# EAGLE board xen_teensy_motherboard_12cv_mki (EAGLE 9.6.0), part 1 of 2
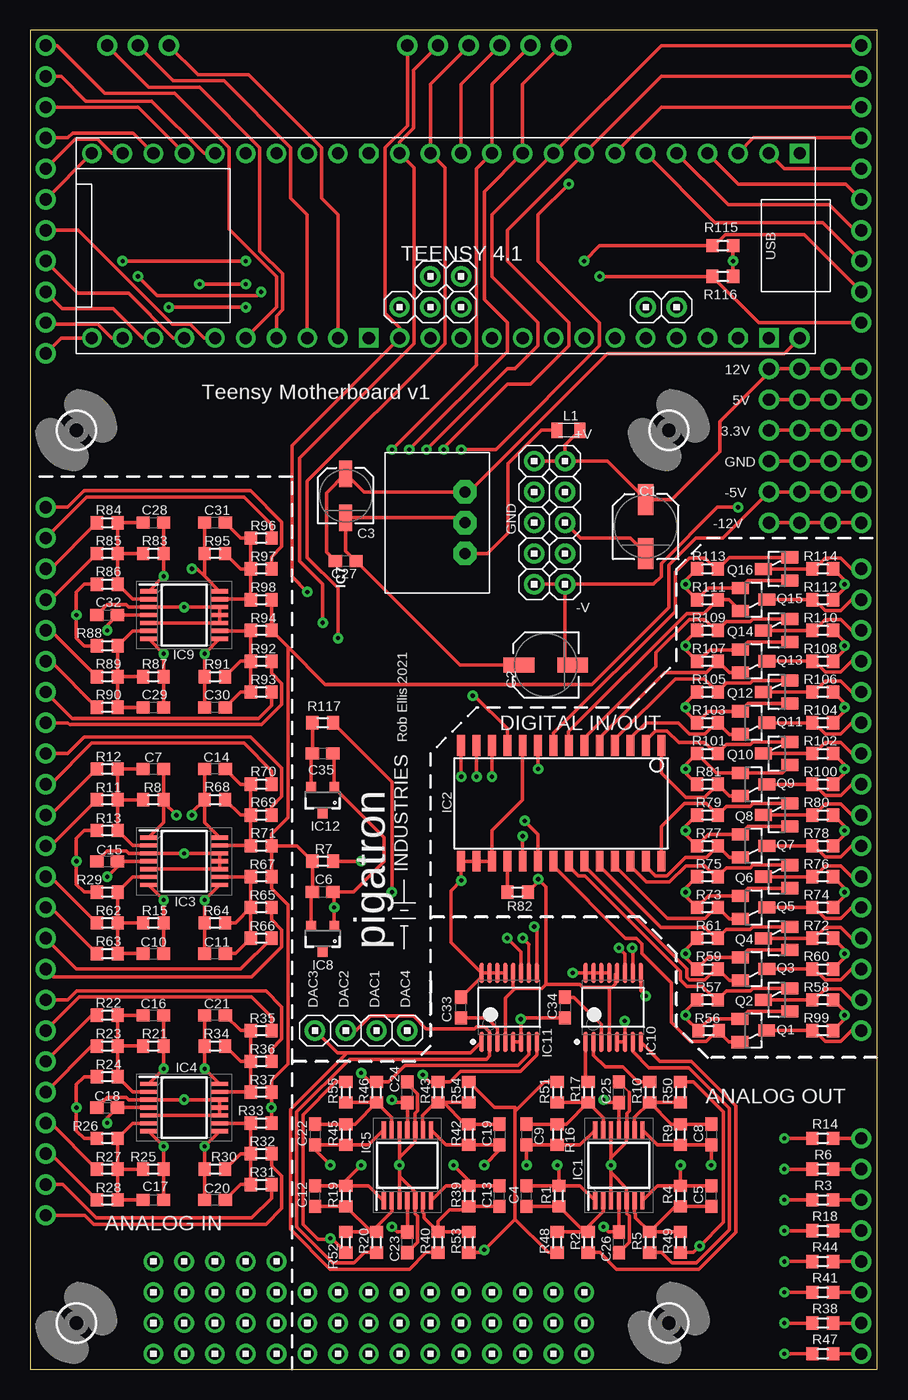
[diagram p0: board, top side]
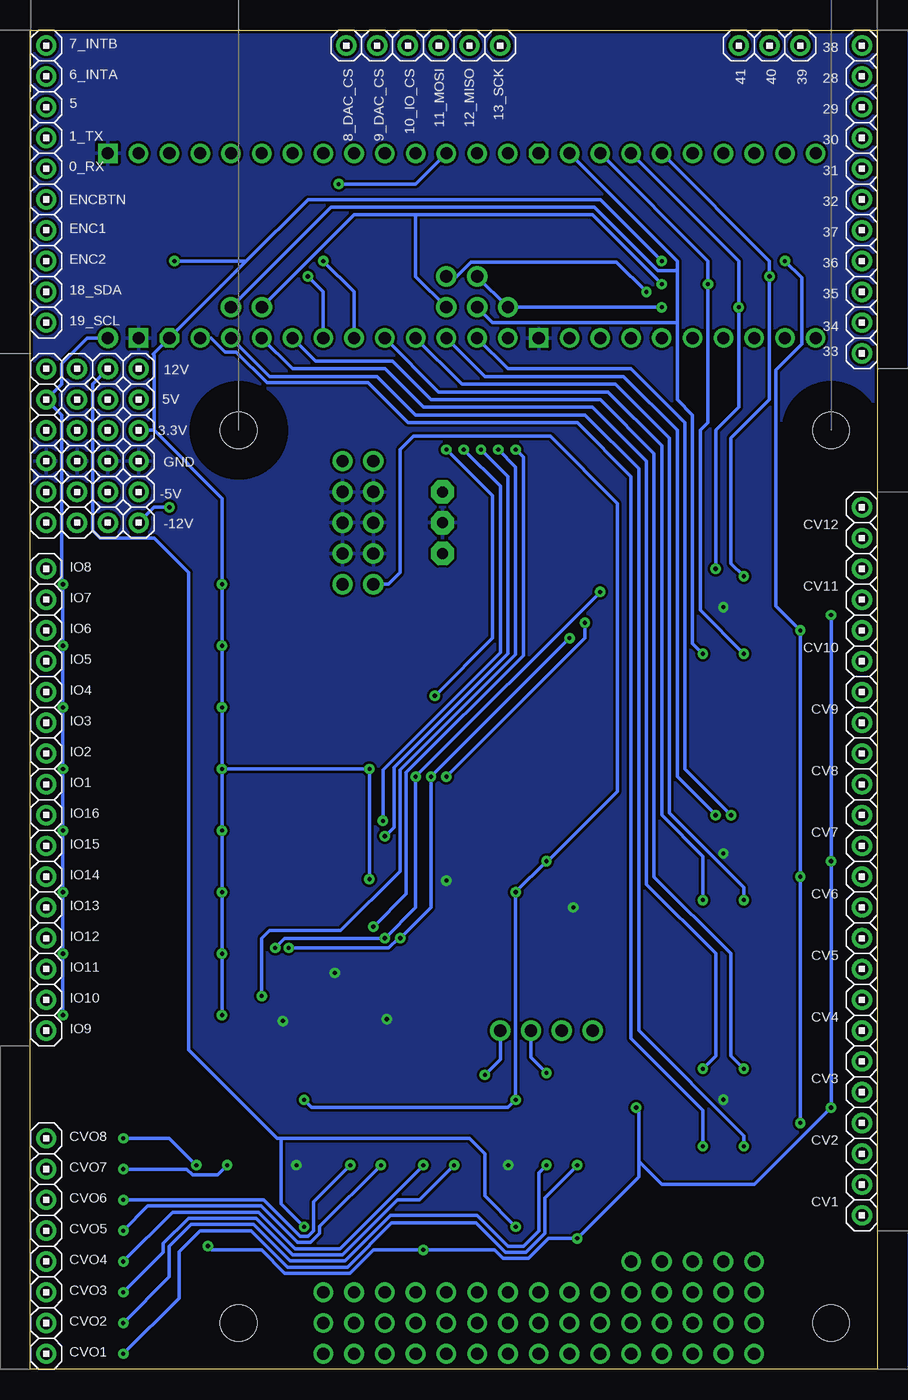
[diagram p1: board, bottom side, seen from below]

Size 69.9 x 110.48 mm. Coordinates in mm from the lower left corner, seen from the top.
Outline: 0,0 69.9,0 69.9,110.48 0,110.48 0,0
Copper layers (1*16): Top 0.0356mm / dielectric 1.5011mm / Bottom 0.0356mm
Design rules "pigatron *": minimum track width 8mil, minimum drill 13mil, track to track 8mil, track to pad 8mil, pad to pad 8mil, via to via 8mil, smd to smd 6mil, copper to edge 10mil, drill to drill 10mil, minimum pad ring 12mil, minimum via ring 10mil, stop-mask expansion 4mil, vias tented up to drill 15mil, thermal gap 10mil

## Footprints (pad centres in the part's own frame; a part is rotated, then mirrored left to right if it is on the bottom)
HEADER/MALE/01 = drill 1.016 pad 1.676: 1 0,0
SV-C = smd 2.54 x 1.27: + -2.223,0; - 2.223,0
SV-B = smd 2.184 x 1.067: + -1.81,0; - 1.81,0
C0603 = smd 1.1 x 1: 1 -0.85,0; 2 0.85,0
TSSOP14 = smd 0.35 x 1.4: 1 -1.95,-2.938; 2 -1.3,-2.938; 3 -0.65,-2.938; 4 0,-2.938; 5 0.65,-2.938; 6 1.3,-2.938; 7 1.95,-2.938; 8 1.95,2.938; 9 1.3,2.938; 10 0.65,2.938; 11 0,2.938; 12 -0.65,2.938; 13 -1.3,2.938; 14 -1.95,2.938
SO28W = smd 0.65 x 1.7: 1 -7.62,-4.78; 2 -6.35,-4.78; 3 -5.08,-4.78; 4 -3.81,-4.78; 5 -2.54,-4.78; 6 -1.27,-4.78; 7 0,-4.78; 8 1.27,-4.78; 9 2.54,-4.78; 10 3.81,-4.78; 11 5.08,-4.78; 12 6.35,-4.78; 13 7.62,-4.78; 14 8.89,-4.78; 15 8.89,4.78; 16 7.62,4.78; 17 6.35,4.78; 18 5.08,4.78; 19 3.81,4.78; 20 2.54,4.78; 21 1.27,4.78; 22 0,4.78; 23 -1.27,4.78; 24 -2.54,4.78; 25 -3.81,4.78; 26 -5.08,4.78; 27 -6.35,4.78; 28 -7.62,4.78
TENNSY41-OUTER = drill 1: 0-RX1/CS1/CRX2 -27.94,-7.62; 1-TX1/MISO1/CTX2 -25.4,-7.62; 2-OUT2 -22.86,-7.62; 3-LRCLK2 -20.32,-7.62; 4-BCLK2 -17.78,-7.62; 5-IN2 -15.24,-7.62; 6-OUT1D -12.7,-7.62; 7-RX2/OUT1A -10.16,-7.62; 8-TX2/IN1 -7.62,-7.62; 9-OUT1C -5.08,-7.62; 10-CS\MQSR -2.54,-7.62; 11-MOSI/CTX1 0,-7.62; 12-MISO/MQSL 2.54,-7.62; 13-SCK/LED 2.54,7.62; 14-A0/TX3/SPDIF_OUT 0,7.62; 15-A1/RX3/SPDIF_IN -2.54,7.62; 16-A2/RX4/SCL1 -5.08,7.62; 17-A3/TX4/SDA1 -7.62,7.62; 18-A4/SDA0 -10.16,7.62; 19-A5/SCL0 -12.7,7.62; 20-A6/TX5/LRCLK1 -15.24,7.62; 21-A7/RX5/BCLK1 -17.78,7.62; 22-A8/CTX1 -20.32,7.62; 23-A9/CRX1/MCLK1 -22.86,7.62; 24-A10/TX6/SCL2 7.62,-7.62; 25-A11/RX6/SDA2 10.16,-7.62; 26-A12/MOSI1 12.7,-7.62; 27-A13/SCK1 15.24,-7.62; 28-RX7 17.78,-7.62; 29-TX7 20.32,-7.62; 30-CRX3 22.86,-7.62; 31-CTX3 25.4,-7.62; 32-OUT1B 27.94,-7.62; 33-MCLK2 27.94,7.62; 34-RX8 25.4,7.62; 35-TX8 22.86,7.62; 36-PWM 20.32,7.62; 37-PWM 17.78,7.62; 38-A14/CS/IN1 15.24,7.62; 39-A15/CS/OUT1A 12.7,7.62; 40-A16/CS1 10.16,7.62; 41-A17/MISO1 7.62,7.62 | drill 1 octagon: 3V3-1 5.08,-7.62; 3V3-3 -25.4,7.62 | drill 1 square: GND1 -30.48,-7.62; GND3 5.08,7.62; GND6 -27.94,7.62 | drill 1 pad 1.676: VIN -30.48,7.62
WE78 = drill 0.9 pad 1.93 octagon: 1 -2.54,0; 2 0,0; 3 2.54,0
SOT-23 = smd 0.8 x 0.9: 1 -0.95,-1; 2 0.95,-1; 3 0,1.1
TEXAS_INSTRUMENTS_DAC8164IBPWG4_1 = smd 1.7 x 0.35: 1 -2.85,2.275; 2 -2.85,1.625; 3 -2.85,0.975; 4 -2.85,0.325; 5 -2.85,-0.325; 6 -2.85,-0.975; 7 -2.85,-1.625; 8 -2.85,-2.275; 9 2.85,-2.275; 10 2.85,-1.625; 11 2.85,-0.975; 12 2.85,-0.325; 13 2.85,0.325; 14 2.85,0.975; 15 2.85,1.625; 16 2.85,2.275
L2012C = smd 0.9 x 1.25: 1 -0.9,0; 2 1,0
HEADER/MALE/01/NOBORDER = drill 1.016: 1 0,0
SOT23 = smd 1 x 1.4: 1 -0.95,-1.1; 2 0.95,-1.1; 3 0,1.1
R0603 = smd 1 x 1.1: 1 -0.85,0; 2 0.85,0
STANDOFF/3.0 = hole 3: 0,0

## Placement (x,y rotation side)
0_RX  HEADER/MALE/01  [HEADER/MALE/01]  68.58,99.06 0 bottom
1_TX  HEADER/MALE/01  [HEADER/MALE/01]  68.58,101.6 0 bottom
3.3V  HEADER/MALE/01  [HEADER/MALE/01]  60.96,77.47 90 bottom
3.3V1  HEADER/MALE/01  [HEADER/MALE/01]  63.5,77.47 180 bottom
3.3V2  HEADER/MALE/01  [HEADER/MALE/01]  66.04,77.47 0 bottom
3.3V3  HEADER/MALE/01  [HEADER/MALE/01]  68.58,77.47 0 bottom
5  HEADER/MALE/01  [HEADER/MALE/01]  68.58,104.14 0 bottom
5V  HEADER/MALE/01  [HEADER/MALE/01]  60.96,80.01 180 bottom
5V1  HEADER/MALE/01  [HEADER/MALE/01]  63.5,80.01 180 bottom
5V2  HEADER/MALE/01  [HEADER/MALE/01]  66.04,80.01 0 bottom
5V3  HEADER/MALE/01  [HEADER/MALE/01]  68.58,80.01 0 bottom
6_INTA  HEADER/MALE/01  [HEADER/MALE/01]  68.58,106.68 0 bottom
7_INTB  HEADER/MALE/01  [HEADER/MALE/01]  68.58,109.22 0 bottom
8_DAC_CS  HEADER/MALE/01  [HEADER/MALE/01]  43.81,109.22 270 bottom
9_DAC_CS  HEADER/MALE/01  [HEADER/MALE/01]  41.27,109.22 270 bottom
10_IO_CS  HEADER/MALE/01  [HEADER/MALE/01]  38.73,109.22 270 bottom
11_MOSI  HEADER/MALE/01  [HEADER/MALE/01]  36.2,109.22 270 bottom
12_MISO  HEADER/MALE/01  [HEADER/MALE/01]  33.66,109.22 270 bottom
13_SCK  HEADER/MALE/01  [HEADER/MALE/01]  31.11,109.22 270 bottom
18_SDA  HEADER/MALE/01  [HEADER/MALE/01]  68.58,88.9 0 bottom
19_SCL  HEADER/MALE/01  [HEADER/MALE/01]  68.58,86.36 0 bottom
24_4.0-A10  HEADER/MALE/01  [HEADER/MALE/01]  33.02,87.63 0 top
24_LC-A10  HEADER/MALE/01  [HEADER/MALE/01]  53.34,87.63 90 top
25_4.0-A11  HEADER/MALE/01  [HEADER/MALE/01]  35.56,87.63 0 top
25_LC-A11  HEADER/MALE/01  [HEADER/MALE/01]  50.8,87.63 90 top
26_4.0-A12  HEADER/MALE/01  [HEADER/MALE/01]  33.02,90.17 0 top
26_LC-A12  HEADER/MALE/01  [HEADER/MALE/01]  30.48,87.63 90 top
27_4.0-A13  HEADER/MALE/01  [HEADER/MALE/01]  35.56,90.17 0 top
28  HEADER/MALE/01  [HEADER/MALE/01]  1.27,106.68 180 bottom
29  HEADER/MALE/01  [HEADER/MALE/01]  1.27,104.14 180 bottom
30  HEADER/MALE/01  [HEADER/MALE/01]  1.27,101.6 180 bottom
31  HEADER/MALE/01  [HEADER/MALE/01]  1.27,99.06 180 bottom
32  HEADER/MALE/01  [HEADER/MALE/01]  1.27,96.52 180 bottom
33  HEADER/MALE/01  [HEADER/MALE/01]  1.27,83.82 180 bottom
34  HEADER/MALE/01  [HEADER/MALE/01]  1.27,86.36 180 bottom
35  HEADER/MALE/01  [HEADER/MALE/01]  1.27,88.9 180 bottom
36  HEADER/MALE/01  [HEADER/MALE/01]  1.27,91.44 180 bottom
37  HEADER/MALE/01  [HEADER/MALE/01]  1.27,93.98 180 bottom
38  HEADER/MALE/01  [HEADER/MALE/01]  1.27,109.22 180 bottom
39  HEADER/MALE/01  [HEADER/MALE/01]  6.35,109.22 270 bottom
40  HEADER/MALE/01  [HEADER/MALE/01]  8.89,109.22 270 bottom
41  HEADER/MALE/01  [HEADER/MALE/01]  11.43,109.22 270 bottom
+V  HEADER/MALE/01  [HEADER/MALE/01]  44.13,74.93 0 top
+V1  HEADER/MALE/01  [HEADER/MALE/01]  63.5,82.55 0 bottom
+V2  HEADER/MALE/01  [HEADER/MALE/01]  41.59,74.93 180 top
+V3  HEADER/MALE/01  [HEADER/MALE/01]  60.96,82.55 0 bottom
+V4  HEADER/MALE/01  [HEADER/MALE/01]  66.04,82.55 0 bottom
+V5  HEADER/MALE/01  [HEADER/MALE/01]  68.58,82.55 0 bottom
-5V  HEADER/MALE/01  [HEADER/MALE/01]  63.5,72.39 180 bottom
-5V1  HEADER/MALE/01  [HEADER/MALE/01]  60.96,72.39 180 bottom
-5V2  HEADER/MALE/01  [HEADER/MALE/01]  66.04,72.39 0 bottom
-5V3  HEADER/MALE/01  [HEADER/MALE/01]  68.58,72.39 0 bottom
-V  HEADER/MALE/01  [HEADER/MALE/01]  44.13,64.77 0 top
-V1  HEADER/MALE/01  [HEADER/MALE/01]  60.96,69.85 0 bottom
-V2  HEADER/MALE/01  [HEADER/MALE/01]  41.59,64.77 180 top
-V3  HEADER/MALE/01  [HEADER/MALE/01]  63.5,69.85 0 bottom
-V4  HEADER/MALE/01  [HEADER/MALE/01]  66.04,69.85 0 bottom
-V5  HEADER/MALE/01  [HEADER/MALE/01]  68.58,69.85 0 bottom
C1  22uF  [SV-C]  50.8,69.53 270 top
C2  22uF  [SV-C]  42.55,58.1 0 top
C3  10uF  [SV-B]  26.04,72.07 270 top
C4  100pF  [C0603]  40.96,14.29 90 top
C5  100pF  [C0603]  56.2,14.29 90 top
C6  100nF  [C0603]  24.13,39.37 180 top
C7  1nF  [C0603]  10.16,49.53 0 top
C8  100pF  [C0603]  56.2,19.37 270 top
C9  100pF  [C0603]  40.96,19.37 270 top
C10  1nF  [C0603]  10.16,34.29 0 top
C11  1nF  [C0603]  15.24,34.29 180 top
C12  100pF  [C0603]  23.5,14.29 90 top
C13  100pF  [C0603]  38.73,14.29 90 top
C14  1nF  [C0603]  15.24,49.53 180 top
C15  100nF  [C0603]  6.35,41.91 0 top
C16  1nF  [C0603]  10.16,29.21 0 top
C17  1nF  [C0603]  10.16,13.97 0 top
C18  100nF  [C0603]  6.35,21.59 0 top
C19  100pF  [C0603]  38.73,19.37 270 top
C20  1nF  [C0603]  15.24,13.97 180 top
C21  1nF  [C0603]  15.24,29.21 180 top
C22  100pF  [C0603]  23.5,19.37 270 top
C23  100nF  [C0603]  31.11,10.48 90 top
C24  100nF  [C0603]  31.11,22.86 90 top
C25  100nF  [C0603]  48.58,22.86 90 top
C26  100nF  [C0603]  48.58,10.48 90 top
C27  100nF  [C0603]  26.04,66.67 180 top
C28  1nF  [C0603]  10.16,69.85 0 top
C29  1nF  [C0603]  10.16,54.61 0 top
C30  1nF  [C0603]  15.24,54.61 180 top
C31  1nF  [C0603]  15.24,69.85 180 top
C32  100nF  [C0603]  6.35,62.23 0 top
C33  470nF  [C0603]  35.56,29.84 90 top
C34  470nF  [C0603]  44.13,29.84 270 top
C35  470nF  [C0603]  24.13,50.8 180 top
CV1  HEADER/MALE/01  [HEADER/MALE/01]  1.27,15.24 0 bottom
CV1B  HEADER/MALE/01  [HEADER/MALE/01]  1.27,22.86 0 bottom
CV2  HEADER/MALE/01  [HEADER/MALE/01]  1.27,20.32 0 bottom
CV2B  HEADER/MALE/01  [HEADER/MALE/01]  1.27,17.78 0 bottom
CV3  HEADER/MALE/01  [HEADER/MALE/01]  1.27,25.4 0 bottom
CV3B  HEADER/MALE/01  [HEADER/MALE/01]  1.27,12.7 0 bottom
CV4  HEADER/MALE/01  [HEADER/MALE/01]  1.27,27.94 0 bottom
CV4B  HEADER/MALE/01  [HEADER/MALE/01]  1.27,30.48 0 bottom
CV5  HEADER/MALE/01  [HEADER/MALE/01]  1.27,33.02 180 bottom
CV6  HEADER/MALE/01  [HEADER/MALE/01]  1.27,40.64 180 bottom
CV7  HEADER/MALE/01  [HEADER/MALE/01]  1.27,43.18 180 bottom
CV8  HEADER/MALE/01  [HEADER/MALE/01]  1.27,50.8 180 bottom
CV9  HEADER/MALE/01  [HEADER/MALE/01]  1.27,53.34 180 bottom
CV9B  HEADER/MALE/01  [HEADER/MALE/01]  1.27,45.72 180 bottom
CV10  HEADER/MALE/01  [HEADER/MALE/01]  1.27,60.96 180 bottom
CV10B  HEADER/MALE/01  [HEADER/MALE/01]  1.27,38.1 180 bottom
CV11  HEADER/MALE/01  [HEADER/MALE/01]  1.27,66.04 180 bottom
CV11B  HEADER/MALE/01  [HEADER/MALE/01]  1.27,35.56 180 bottom
CV12  HEADER/MALE/01  [HEADER/MALE/01]  1.27,68.58 180 bottom
CV12B  HEADER/MALE/01  [HEADER/MALE/01]  1.27,48.26 180 bottom
CV13B  HEADER/MALE/01  [HEADER/MALE/01]  1.27,63.5 180 bottom
CV14B  HEADER/MALE/01  [HEADER/MALE/01]  1.27,58.42 180 bottom
CV15B  HEADER/MALE/01  [HEADER/MALE/01]  1.27,55.88 180 bottom
CV16B  HEADER/MALE/01  [HEADER/MALE/01]  1.27,71.12 180 bottom
CVO1  HEADER/MALE/01  [HEADER/MALE/01]  68.58,1.27 0 bottom
CVO2  HEADER/MALE/01  [HEADER/MALE/01]  68.58,3.81 0 bottom
CVO3  HEADER/MALE/01  [HEADER/MALE/01]  68.58,6.35 0 bottom
CVO4  HEADER/MALE/01  [HEADER/MALE/01]  68.58,8.89 0 bottom
CVO5  HEADER/MALE/01  [HEADER/MALE/01]  68.58,11.43 0 bottom
CVO6  HEADER/MALE/01  [HEADER/MALE/01]  68.58,13.97 0 bottom
CVO7  HEADER/MALE/01  [HEADER/MALE/01]  68.58,16.51 0 bottom
CVO8  HEADER/MALE/01  [HEADER/MALE/01]  68.58,19.05 0 bottom
DAC1  HEADER/MALE/01  [HEADER/MALE/01]  28.57,27.94 90 top
DAC2  HEADER/MALE/01  [HEADER/MALE/01]  26.04,27.94 90 top
DAC3  HEADER/MALE/01  [HEADER/MALE/01]  23.5,27.94 90 top
DAC4  HEADER/MALE/01  [HEADER/MALE/01]  31.11,27.94 90 top
ENC1  HEADER/MALE/01  [HEADER/MALE/01]  68.58,93.98 0 bottom
ENC2  HEADER/MALE/01  [HEADER/MALE/01]  68.58,91.44 0 bottom
ENCBTN  HEADER/MALE/01  [HEADER/MALE/01]  68.58,96.52 0 bottom
GND  HEADER/MALE/01  [HEADER/MALE/01]  44.13,69.85 0 top
GND1  HEADER/MALE/01  [HEADER/MALE/01]  44.13,72.39 0 top
GND2  HEADER/MALE/01  [HEADER/MALE/01]  41.59,67.31 180 top
GND3  HEADER/MALE/01  [HEADER/MALE/01]  44.13,67.31 180 top
GND4  HEADER/MALE/01  [HEADER/MALE/01]  41.59,69.85 0 top
GND5  HEADER/MALE/01  [HEADER/MALE/01]  41.59,72.39 0 top
GND6  HEADER/MALE/01  [HEADER/MALE/01]  63.5,74.93 0 bottom
GND7  HEADER/MALE/01  [HEADER/MALE/01]  60.96,74.93 0 bottom
GND8  HEADER/MALE/01  [HEADER/MALE/01]  66.04,74.93 0 bottom
GND9  HEADER/MALE/01  [HEADER/MALE/01]  68.58,74.93 0 bottom
IC1  TL074PW  [TSSOP14]  48.58,16.83 0 top
IC2  MCP23S17SO  [SO28W]  44.45,46.69 180 top
IC3  MCP6004  [TSSOP14]  12.7,41.91 270 top
IC4  MCP6004  [TSSOP14]  12.7,21.59 270 top
IC5  TL074PW  [TSSOP14]  31.11,16.83 0 top
IC6  TEENSY41-OUTER  [TENNSY41-OUTER]  33.02,92.71 180 top
IC7  R-78E5.0-0.5  [WE78]  35.88,69.85 90 top
IC8  LM4040-5V  [SOT-23]  24.13,35.56 180 top
IC9  MCP6004  [TSSOP14]  12.7,62.23 270 top
IC10  TEXAS_INSTRUMENTS_DAC8164IBPWG4TEXAS_INSTRUMENTS_DAC8164IBPWG4_0_1  [TEXAS_INSTRUMENTS_DAC8164IBPWG4_1]  48.1,29.84 90 top
IC11  TEXAS_INSTRUMENTS_DAC8164IBPWG4TEXAS_INSTRUMENTS_DAC8164IBPWG4_0_1  [TEXAS_INSTRUMENTS_DAC8164IBPWG4_1]  39.53,29.84 90 top
IC12  LM4040-10V  [SOT-23]  24.13,46.99 180 top
IO1  HEADER/MALE/01  [HEADER/MALE/01]  68.58,48.26 180 bottom
IO2  HEADER/MALE/01  [HEADER/MALE/01]  68.58,50.8 180 bottom
IO3  HEADER/MALE/01  [HEADER/MALE/01]  68.58,53.34 180 bottom
IO4  HEADER/MALE/01  [HEADER/MALE/01]  68.58,55.88 180 bottom
IO5  HEADER/MALE/01  [HEADER/MALE/01]  68.58,58.42 180 bottom
IO6  HEADER/MALE/01  [HEADER/MALE/01]  68.58,60.96 180 bottom
IO7  HEADER/MALE/01  [HEADER/MALE/01]  68.58,63.5 180 bottom
IO8  HEADER/MALE/01  [HEADER/MALE/01]  68.58,66.04 180 bottom
IO9  HEADER/MALE/01  [HEADER/MALE/01]  68.58,27.94 180 bottom
IO10  HEADER/MALE/01  [HEADER/MALE/01]  68.58,30.48 180 bottom
IO11  HEADER/MALE/01  [HEADER/MALE/01]  68.58,33.02 180 bottom
IO12  HEADER/MALE/01  [HEADER/MALE/01]  68.58,35.56 180 bottom
IO13  HEADER/MALE/01  [HEADER/MALE/01]  68.58,38.1 180 bottom
IO14  HEADER/MALE/01  [HEADER/MALE/01]  68.58,40.64 180 bottom
IO15  HEADER/MALE/01  [HEADER/MALE/01]  68.58,43.18 180 bottom
IO16  HEADER/MALE/01  [HEADER/MALE/01]  68.58,45.72 180 bottom
L1  33uH  [L2012C]  44.45,77.47 180 top
P1  HEADER/MALE/01NOBORDER  [HEADER/MALE/01/NOBORDER]  10.16,1.27 0 top
P2  HEADER/MALE/01NOBORDER  [HEADER/MALE/01/NOBORDER]  12.7,1.27 0 top
P3  HEADER/MALE/01NOBORDER  [HEADER/MALE/01/NOBORDER]  15.24,1.27 0 top
P4  HEADER/MALE/01NOBORDER  [HEADER/MALE/01/NOBORDER]  17.78,1.27 0 top
P5  HEADER/MALE/01NOBORDER  [HEADER/MALE/01/NOBORDER]  20.32,1.27 0 top
P6  HEADER/MALE/01NOBORDER  [HEADER/MALE/01/NOBORDER]  10.16,3.81 0 top
P7  HEADER/MALE/01NOBORDER  [HEADER/MALE/01/NOBORDER]  12.7,3.81 0 top
P8  HEADER/MALE/01NOBORDER  [HEADER/MALE/01/NOBORDER]  15.24,3.81 0 top
P9  HEADER/MALE/01NOBORDER  [HEADER/MALE/01/NOBORDER]  17.78,3.81 0 top
P10  HEADER/MALE/01NOBORDER  [HEADER/MALE/01/NOBORDER]  20.32,3.81 0 top
P11  HEADER/MALE/01NOBORDER  [HEADER/MALE/01/NOBORDER]  10.16,6.35 0 top
P12  HEADER/MALE/01NOBORDER  [HEADER/MALE/01/NOBORDER]  12.7,6.35 0 top
P13  HEADER/MALE/01NOBORDER  [HEADER/MALE/01/NOBORDER]  15.24,6.35 0 top
P14  HEADER/MALE/01NOBORDER  [HEADER/MALE/01/NOBORDER]  17.78,6.35 0 top
P15  HEADER/MALE/01NOBORDER  [HEADER/MALE/01/NOBORDER]  20.32,6.35 0 top
P16  HEADER/MALE/01NOBORDER  [HEADER/MALE/01/NOBORDER]  10.16,8.89 0 top
P17  HEADER/MALE/01NOBORDER  [HEADER/MALE/01/NOBORDER]  12.7,8.89 0 top
P18  HEADER/MALE/01NOBORDER  [HEADER/MALE/01/NOBORDER]  15.24,8.89 0 top
P19  HEADER/MALE/01NOBORDER  [HEADER/MALE/01/NOBORDER]  17.78,8.89 0 top
P20  HEADER/MALE/01NOBORDER  [HEADER/MALE/01/NOBORDER]  20.32,8.89 0 top
P21  HEADER/MALE/01NOBORDER  [HEADER/MALE/01/NOBORDER]  22.86,1.27 0 top
P22  HEADER/MALE/01NOBORDER  [HEADER/MALE/01/NOBORDER]  22.86,3.81 0 top
P23  HEADER/MALE/01NOBORDER  [HEADER/MALE/01/NOBORDER]  25.4,1.27 0 top
P24  HEADER/MALE/01NOBORDER  [HEADER/MALE/01/NOBORDER]  22.86,6.35 0 top
P25  HEADER/MALE/01NOBORDER  [HEADER/MALE/01/NOBORDER]  25.4,3.81 0 top
P26  HEADER/MALE/01NOBORDER  [HEADER/MALE/01/NOBORDER]  25.4,6.35 0 top
P27  HEADER/MALE/01NOBORDER  [HEADER/MALE/01/NOBORDER]  30.48,6.35 0 top
P28  HEADER/MALE/01NOBORDER  [HEADER/MALE/01/NOBORDER]  27.94,6.35 0 top
P29  HEADER/MALE/01NOBORDER  [HEADER/MALE/01/NOBORDER]  30.48,3.81 0 top
P30  HEADER/MALE/01NOBORDER  [HEADER/MALE/01/NOBORDER]  27.94,3.81 0 top
P31  HEADER/MALE/01NOBORDER  [HEADER/MALE/01/NOBORDER]  30.48,1.27 0 top
P32  HEADER/MALE/01NOBORDER  [HEADER/MALE/01/NOBORDER]  27.94,1.27 0 top
P33  HEADER/MALE/01NOBORDER  [HEADER/MALE/01/NOBORDER]  33.02,6.35 0 top
P34  HEADER/MALE/01NOBORDER  [HEADER/MALE/01/NOBORDER]  33.02,3.81 0 top
P35  HEADER/MALE/01NOBORDER  [HEADER/MALE/01/NOBORDER]  35.56,6.35 0 top
P36  HEADER/MALE/01NOBORDER  [HEADER/MALE/01/NOBORDER]  33.02,1.27 0 top
P37  HEADER/MALE/01NOBORDER  [HEADER/MALE/01/NOBORDER]  38.1,3.81 0 top
P38  HEADER/MALE/01NOBORDER  [HEADER/MALE/01/NOBORDER]  35.56,3.81 0 top
P39  HEADER/MALE/01NOBORDER  [HEADER/MALE/01/NOBORDER]  40.64,6.35 0 top
P40  HEADER/MALE/01NOBORDER  [HEADER/MALE/01/NOBORDER]  35.56,1.27 0 top
P41  HEADER/MALE/01NOBORDER  [HEADER/MALE/01/NOBORDER]  40.64,3.81 0 top
P42  HEADER/MALE/01NOBORDER  [HEADER/MALE/01/NOBORDER]  38.1,6.35 0 top
P43  HEADER/MALE/01NOBORDER  [HEADER/MALE/01/NOBORDER]  43.18,6.35 0 top
P44  HEADER/MALE/01NOBORDER  [HEADER/MALE/01/NOBORDER]  38.1,1.27 0 top
P45  HEADER/MALE/01NOBORDER  [HEADER/MALE/01/NOBORDER]  43.18,3.81 0 top
P46  HEADER/MALE/01NOBORDER  [HEADER/MALE/01/NOBORDER]  40.64,1.27 0 top
P47  HEADER/MALE/01NOBORDER  [HEADER/MALE/01/NOBORDER]  43.18,1.27 0 top
P48  HEADER/MALE/01NOBORDER  [HEADER/MALE/01/NOBORDER]  45.72,6.35 0 top
P49  HEADER/MALE/01NOBORDER  [HEADER/MALE/01/NOBORDER]  45.72,3.81 0 top
P50  HEADER/MALE/01NOBORDER  [HEADER/MALE/01/NOBORDER]  45.72,1.27 0 top
Q1  BF170  [SOT23]  59.67,27.94 270 top
Q2  BF170  [SOT23]  61.59,30.48 90 top
Q3  BF170  [SOT23]  59.69,33.02 270 top
Q4  BF170  [SOT23]  61.59,35.56 90 top
Q5  BF170  [SOT23]  59.69,38.1 270 top
Q6  BF170  [SOT23]  61.59,40.64 90 top
Q7  BF170  [SOT23]  59.69,43.18 270 top
Q8  BF170  [SOT23]  61.59,45.72 90 top
Q9  BF170  [SOT23]  59.69,48.26 270 top
Q10  BF170  [SOT23]  61.59,50.8 90 top
Q11  BF170  [SOT23]  59.69,53.34 270 top
Q12  BF170  [SOT23]  61.59,55.88 90 top
Q13  BF170  [SOT23]  59.69,58.42 270 top
Q14  BF170  [SOT23]  61.59,60.96 90 top
Q15  BF170  [SOT23]  59.69,63.5 270 top
Q16  BF170  [SOT23]  61.59,66.04 90 top
R1  120k  [R0603]  43.62,14.29 90 top
R2  30k  [R0603]  46.04,10.48 90 top
R3  1k  [R0603]  65.41,13.97 0 top
R4  120k  [R0603]  53.66,14.29 90 top
R5  30k  [R0603]  51.12,10.48 90 top
R6  1k  [R0603]  65.41,16.51 0 top
R7  2K  [R0603]  24.13,41.91 0 top
R8  33k  [R0603]  10.16,46.99 0 top
R9  120k  [R0603]  53.66,19.37 270 top
R10  30k  [R0603]  51.12,22.86 270 top
R11  100k  [R0603]  6.35,46.99 0 top
R12  100k  [R0603]  6.35,49.53 0 top
R13  100k  [R0603]  6.35,44.45 0 top
R14  1k  [R0603]  65.41,19.05 0 top
R15  33k  [R0603]  10.16,36.83 0 top
R16  120k  [R0603]  43.5,19.37 270 top
R17  30k  [R0603]  46.04,22.86 270 top
R18  1k  [R0603]  65.41,11.43 0 top
R19  120k  [R0603]  26.04,14.29 90 top
R20  30k  [R0603]  28.57,10.48 90 top
R21  33k  [R0603]  10.16,26.67 0 top
R22  100k  [R0603]  6.35,29.21 0 top
R23  100k  [R0603]  6.35,26.67 0 top
R24  100k  [R0603]  6.35,24.13 0 top
R25  33k  [R0603]  10.16,16.51 0 top
R26  100k  [R0603]  6.35,19.05 0 top
R27  100k  [R0603]  6.35,16.51 0 top
R28  100k  [R0603]  6.35,13.97 0 top
R29  100k  [R0603]  6.35,39.37 0 top
R30  33k  [R0603]  15.24,16.51 180 top
R31  100k  [R0603]  19.05,15.24 180 top
R32  100k  [R0603]  19.05,17.78 180 top
R33  100k  [R0603]  19.05,20.32 180 top
R34  33k  [R0603]  15.24,26.67 180 top
R35  100k  [R0603]  19.05,27.94 180 top
R36  100k  [R0603]  19.05,25.4 180 top
R37  100k  [R0603]  19.05,22.86 180 top
R38  1k  [R0603]  65.41,3.81 0 top
R39  120k  [R0603]  36.2,14.29 90 top
R40  30k  [R0603]  33.66,10.48 90 top
R41  1k  [R0603]  65.41,6.35 0 top
R42  120k  [R0603]  36.2,19.37 270 top
R43  30k  [R0603]  33.66,22.86 270 top
R44  1k  [R0603]  65.41,8.89 0 top
R45  120k  [R0603]  26.04,19.37 270 top
R46  30k  [R0603]  28.57,22.86 270 top
R47  1k  [R0603]  65.41,1.27 0 top
R48  120k  [R0603]  43.5,10.48 90 top
R49  120k  [R0603]  53.66,10.48 90 top
R50  120k  [R0603]  53.66,22.86 270 top
R51  120k  [R0603]  43.5,22.86 270 top
R52  120k  [R0603]  26.04,10.48 90 top
R53  120k  [R0603]  36.2,10.48 90 top
R54  120k  [R0603]  36.2,22.86 270 top
R55  120k  [R0603]  26.04,22.86 270 top
R56  10k  [R0603]  55.98,27.94 180 top
R57  10k  [R0603]  55.88,30.48 180 top
R58  10k  [R0603]  65.41,30.48 0 top
R59  10k  [R0603]  55.88,33.02 180 top
R60  10k  [R0603]  65.41,33.02 0 top
R61  10k  [R0603]  55.88,35.56 180 top
R62  100k  [R0603]  6.35,36.83 0 top
R63  100k  [R0603]  6.35,34.29 0 top
R64  33k  [R0603]  15.24,36.83 180 top
R65  100k  [R0603]  19.05,38.1 180 top
R66  100k  [R0603]  19.05,35.56 180 top
R67  100k  [R0603]  19.05,40.64 180 top
R68  33k  [R0603]  15.24,46.99 180 top
R69  100k  [R0603]  19.05,45.72 180 top
R70  100k  [R0603]  19.05,48.26 180 top
R71  100k  [R0603]  19.05,43.18 180 top
R72  10k  [R0603]  65.41,35.56 0 top
R73  10k  [R0603]  55.88,38.1 180 top
R74  10k  [R0603]  65.41,38.1 0 top
R75  10k  [R0603]  55.88,40.64 180 top
R76  10k  [R0603]  65.41,40.64 0 top
R77  10k  [R0603]  55.88,43.18 180 top
R78  10k  [R0603]  65.41,43.18 0 top
R79  10k  [R0603]  55.88,45.72 180 top
R80  10k  [R0603]  65.41,45.72 0 top
R81  10k  [R0603]  55.88,48.26 180 top
R82  1k  [R0603]  40.22,39.37 180 top
R83  33k  [R0603]  10.16,67.31 0 top
R84  100k  [R0603]  6.35,69.85 0 top
R85  100k  [R0603]  6.35,67.31 0 top
R86  100k  [R0603]  6.35,64.77 0 top
R87  33k  [R0603]  10.16,57.15 0 top
R88  100k  [R0603]  6.35,59.69 0 top
R89  100k  [R0603]  6.35,57.15 0 top
R90  100k  [R0603]  6.35,54.61 0 top
R91  33k  [R0603]  15.24,57.15 180 top
R92  100k  [R0603]  19.05,58.42 180 top
R93  100k  [R0603]  19.05,55.88 180 top
R94  100k  [R0603]  19.05,60.96 180 top
R95  33k  [R0603]  15.24,67.31 180 top
R96  100k  [R0603]  19.05,68.58 180 top
R97  100k  [R0603]  19.05,66.04 180 top
R98  100k  [R0603]  19.05,63.5 180 top
R99  10k  [R0603]  65.41,27.94 0 top
R100  10k  [R0603]  65.41,48.26 0 top
R101  10k  [R0603]  55.88,50.8 180 top
R102  10k  [R0603]  65.41,50.8 0 top
R103  10k  [R0603]  55.88,53.34 180 top
R104  10k  [R0603]  65.41,53.34 0 top
R105  10k  [R0603]  55.88,55.88 180 top
R106  10k  [R0603]  65.41,55.88 0 top
R107  10k  [R0603]  55.88,58.42 180 top
R108  10k  [R0603]  65.41,58.42 0 top
R109  10k  [R0603]  55.88,60.96 180 top
R110  10k  [R0603]  65.41,60.96 0 top
R111  10k  [R0603]  55.88,63.5 180 top
R112  10k  [R0603]  65.41,63.5 0 top
R113  10k  [R0603]  55.88,66.04 180 top
R114  10k  [R0603]  65.41,66.04 0 top
R115  2K  [R0603]  57.15,92.71 0 top
R116  2K  [R0603]  57.15,90.17 0 top
R117  1K  [R0603]  24.13,53.34 0 top
U$1  [PIGATRON-LOGO]  29.27,43.56 90 top
U$2  [STANDOFF/3.0]  52.7,3.81 180 top
U$3  [STANDOFF/3.0]  3.81,3.81 180 top
U$4  [STANDOFF/3.0]  52.7,77.47 180 top
U$5  [STANDOFF/3.0]  3.81,77.47 180 top

## Library data of the parts
0_RX 1_TX 3.3V 3.3V1-3.3V3 5 5V 5V1-5V3 6_INTA 7_INTB 8_DAC_CS 9_DAC_CS 10_IO_CS 11_MOSI 12_MISO 13_SCK 18_SDA 19_SCL 24_4.0-A10 24_LC-A10 25_4.0-A11 25_LC-A11 26_4.0-A12 26_LC-A12 27_4.0-A13 28-41 +V +V1-+V5 -5V -5V1--5V3 -V -V1--V5 CV1 CV1B CV2 CV2B CV3 CV3B CV4 CV4B CV5-CV9 CV9B CV10 CV10B CV11 CV11B CV12 CV12B CV13B CV14B CV15B CV16B CVO1-CVO8 DAC1-DAC4 ENC1 ENC2 ENCBTN GND GND1-GND9 IO1-IO16 P1-P50 = connectors; SPICEPREFIX: X
C1-C3 = capacitors; SPICEPREFIX: C
C4-C35 = capacitors
IC1 IC3-IC5 IC9 = ic_analogue
IC2 = ic_digital; MF: MICROCHIP; MPN: MCP23S17-E/SO; OC_FARNELL: unknown; OC_NEWARK: 31K2950
IC6 = microcontroller
IC7 IC8 IC12 = ic_voltage_reg
IC10 IC11 = ic_dac; CIIVA_IDS: 1106843; CODE__JEDEC: MO-153; COMPONENT_LINK_1_DESCRIPTION: Manufacturer URL; COMPONENT_LINK_1_URL: http://www.ti.com/; COMPONENT_LINK_3_DESCRIPTION: Package Specification; COMPONENT_LINK_3_URL: http://www.ti.com/lit/ml/mpds361/mpds361.pdf; DAC_CHANNELS: 4; DATASHEET: http://www.ti.com/general/docs/lit/getliterature.tsp?genericPartNumber=DAC8164&fileType=pdf; DATASHEET_VERSION: SBAS410B; DNL_MAX__LSB: 1; FOOTPRINT_VARIANT_NAME_0: Level C; FOOTPRINT_VARIANT_NAME_1: Level B; FOOTPRINT_VARIANT_NAME_2: Level A; IMPORTED: yes; IMPORTED_FROM: vault; IMPORT_TS: 1521847417; INL_MAX__LSB: 2; INTERFACE: Serial SPI; MF: Texas Instruments; MOUNTING_TECHNOLOGY: Surface Mount; MPN: DAC8164IBPWG4; PACKAGE: PW16; PACKAGE_DESCRIPTION: 16-Pin Plastic Small Outline, Body 5 x 4.4 mm, Pitch 0.65 mm; PACKAGE_VERSION: 4040064-4/G, 02/2011; PIN_0_0_9_INSIDE_EDGE: clock; POWER_CONSUMPTIONTYPMW: 2.6; PREFIX: U; RELEASE_DATE: 1386925912; RESOLUTION_BITS: 14; ROHS: Yes; SETTLING_TIMEUS: 8; SFDRD_B: 79; SNRD_B: 87; SUB_FAMILY: Precision DAC (=<10MSPS); VAULT_GUID: 4CBE38FC-6508-4746-89A4-DCA776D537C7; VAULT_REVISION: 57F45E06-978A-418D-B5AB-51E808FEEA60
L1 R1-R117 = resistors
Q1-Q16 = transistors
U$1-U$5 = mechanical

## Nets
3.3V: 3.3V1.1 3.3V2.1 3.3V3.1 3.3V.1 C15.2 C18.2 C32.2 IC2.9 IC3.4 IC4.4 IC6.3V3-3 IC9.4 IC10.4 IC10.12 IC11.4 IC11.12 Q1.1 Q2.1 Q3.1 Q4.1 Q5.1 Q6.1 Q7.1 Q8.1 Q9.1 Q10.1 Q11.1 Q12.1 Q13.1 Q14.1 Q15.1 Q16.1 R56.2 R57.2 R59.2 R61.2 R73.2 R75.2 R77.2 R79.2 R81.2 R82.1 R101.2 R103.2 R105.2 R107.2 R109.2 R111.2 R113.2 R115.2 R116.2
5V: 5V1.1 5V2.1 5V3.1 5V.1 C3.+ C27.2 IC6.VIN IC7.3 R58.2 R60.2 R72.2 R74.2 R76.2 R78.2 R80.2 R99.2 R100.2 R102.2 R104.2 R106.2 R108.2 R110.2 R112.2 R114.2
+12V: +V1.1 +V2.1 +V3.1 +V4.1 +V5.1 +V.1 C1.+ C23.2 C26.2 IC1.4 IC5.4 L1.1
-5VREF: -5V1.1 -5V2.1 -5V3.1 -5V.1 C6.2 IC8.2 R7.1 R13.1 R24.1 R26.1 R29.1 R33.1 R37.1 R48.1 R49.1 R50.1 R51.1 R52.1 R53.1 R54.1 R55.1 R67.1 R71.1 R86.1 R88.1 R94.1 R98.1
-10VREF: C35.2 IC12.2 R117.1
-12V: -V1.1 -V2.1 -V3.1 -V4.1 -V5.1 -V.1 C2.- C24.1 C25.1 IC1.11 IC5.11 R7.2 R117.2
ADC0: C7.2 IC3.1 IC6.14-A0/TX3/SPDIF_OUT R8.2
ADC1: C14.2 IC3.14 IC6.15-A1/RX3/SPDIF_IN R68.2
ADC2: C10.2 IC3.7 IC6.16-A2/RX4/SCL1 R15.2
ADC3: C11.2 IC3.8 IC6.17-A3/TX4/SDA1 R64.2
ADC4: C16.2 IC4.1 IC6.20-A6/TX5/LRCLK1 R21.2
ADC5: C21.2 IC4.14 IC6.21-A7/RX5/BCLK1 R34.2
ADC6: C17.2 IC4.7 IC6.22-A8/CTX1 R25.2
ADC7: C20.2 IC4.8 IC6.23-A9/CRX1/MCLK1 R30.2
ADC8: 24_4.0-A10.1 24_LC-A10.1 C30.2 IC6.24-A10/TX6/SCL2 IC9.8 R91.2
ADC9: 25_4.0-A11.1 25_LC-A11.1 C29.2 IC6.25-A11/RX6/SDA2 IC9.7 R87.2
ADC10: 26_4.0-A12.1 26_LC-A12.1 C31.2 IC6.26-A12/MOSI1 IC9.14 R95.2
ADC11: 27_4.0-A13.1 C28.2 IC6.27-A13/SCK1 IC9.1 R83.2
DAC1: DAC1.1 IC11.7 R46.1
DAC2: DAC2.1 IC11.2 R20.1
DAC3: DAC4.1 IC11.8 R43.1
DAC4: DAC3.1 IC11.1 R40.1
DAC5: IC10.1 R17.1
DAC6: IC10.8 R2.1
DAC7: IC10.2 R10.1
DAC8: IC10.7 R5.1
GPA0: IC2.21 Q1.2 R56.1
GPA1: IC2.22 Q2.2 R57.1
GPA2: IC2.23 Q3.2 R59.1
GPA3: IC2.24 Q4.2 R61.1
GPA4: IC2.25 Q5.2 R73.1
GPA5: IC2.26 Q6.2 R75.1
GPA6: IC2.27 Q7.2 R77.1
GPA7: IC2.28 Q8.2 R79.1
GPB0: IC2.1 Q9.2 R81.1
GPB1: IC2.2 Q10.2 R101.1
GPB2: IC2.3 Q11.2 R103.1
GPB3: IC2.4 Q12.2 R105.1
GPB4: IC2.5 Q13.2 R107.1
GPB5: IC2.6 Q14.2 R109.1
GPB6: IC2.7 Q15.2 R111.1
GPB7: IC2.8 Q16.2 R113.1
INTA: 6_INTA.1 IC2.20 IC6.6-OUT1D
INTB: 7_INTB.1 IC2.19 IC6.7-RX2/OUT1A
N$1: CV2.1 R27.1
N$2: C4.1 IC1.2 R1.1 R2.2 R48.2
N$3: C4.2 IC1.1 R1.2 R3.1
N$4: CVO6.1 R3.2
N$5: C5.1 IC1.6 R4.1 R5.2 R49.2
N$6: C5.2 IC1.7 R4.2 R6.1
N$7: CVO7.1 R6.2
N$8: C7.1 IC3.2 R8.1 R11.2 R12.2 R13.2
N$9: C8.1 IC1.9 R9.1 R10.2 R50.2
N$10: C8.2 IC1.8 R9.2 R14.1
N$11: CVO8.1 R14.2
N$12: C9.1 IC1.13 R16.1 R17.2 R51.2
N$13: CV9B.1 R12.1
N$14: CV7.1 R11.1
N$15: C9.2 IC1.14 R16.2 R18.1
N$16: C10.1 IC3.6 R15.1 R29.2 R62.2 R63.2
N$17: CVO5.1 R18.2
N$18: CV6.1 R62.1
N$19: CV10B.1 R63.1
N$20: C12.1 IC5.2 R19.1 R20.2 R52.2
N$21: C12.2 IC5.1 R19.2 R38.1
N$22: CV3.1 R22.1
N$23: 0_RX.1 IC6.0-RX1/CS1/CRX2
N$24: C16.1 IC4.2 R21.1 R22.2 R23.2 R24.2
N$25: CVO2.1 R38.2
N$26: CV2B.1 R28.1
N$27: CV1B.1 R23.1
N$28: C13.1 IC5.6 R39.1 R40.2 R53.2
N$29: C17.1 IC4.6 R25.1 R26.2 R27.2 R28.2
N$30: C21.1 IC4.13 R34.1 R35.2 R36.2 R37.2
N$31: CV4.1 R35.1
N$32: CV4B.1 R36.1
N$33: C13.2 IC5.7 R39.2 R41.1
N$34: CV3B.1 R32.1
N$35: CV1.1 R31.1
N$36: C20.1 IC4.9 R30.1 R31.2 R32.2 R33.2
N$37: 1_TX.1 IC6.1-TX1/MISO1/CTX2
N$38: ENC2.1 IC6.4-BCLK2
N$39: ENC1.1 IC6.3-LRCLK2
N$40: ENCBTN.1 IC6.2-OUT2
N$42: CVO3.1 R41.2
N$43: C19.1 IC5.9 R42.1 R43.2 R54.2
N$44: C19.2 IC5.8 R42.2 R44.1
N$45: 18_SDA.1 IC6.18-A4/SDA0 R115.1
N$46: 19_SCL.1 IC6.19-A5/SCL0 R116.1
N$47: CVO4.1 R44.2
N$48: C22.1 IC5.13 R45.1 R46.2 R55.2
N$49: C22.2 IC5.14 R45.2 R47.1
N$50: CVO1.1 R47.2
N$51: IC7.1 L1.2
N$53: IO9.1 Q1.3 R99.1
N$55: IO10.1 Q2.3 R58.1
N$57: C14.1 IC3.13 R68.1 R69.2 R70.2 R71.2
N$58: IO11.1 Q3.3 R60.1
N$60: CV8.1 R69.1
N$61: IO12.1 Q4.3 R72.1
N$63: IO13.1 Q5.3 R74.1
N$65: IO14.1 Q6.3 R76.1
N$67: IO15.1 Q7.3 R78.1
N$68: CV12B.1 R70.1
N$69: CV11B.1 R66.1
N$70: CV5.1 R65.1
N$71: C11.1 IC3.9 R64.1 R65.2 R66.2 R67.2
N$73: IO16.1 Q8.3 R80.1
N$74: IC6.3V3-1
N$75: C28.1 IC9.2 R83.1 R84.2 R85.2 R86.2
N$76: CV13B.1 R85.1
N$77: CV11.1 R84.1
N$78: C29.1 IC9.6 R87.1 R88.2 R89.2 R90.2
N$79: CV10.1 R89.1
N$80: CV14B.1 R90.1
N$81: C31.1 IC9.13 R95.1 R96.2 R97.2 R98.2
N$82: CV12.1 R96.1
N$83: CV16B.1 R97.1
N$84: CV15B.1 R93.1
N$86: IO1.1 Q9.3 R100.1
N$88: IO2.1 Q10.3 R102.1
N$90: IO3.1 Q11.3 R104.1
N$92: IO4.1 Q12.3 R106.1
N$94: IO5.1 Q13.3 R108.1
N$96: IO6.1 Q14.3 R110.1
N$98: IO7.1 Q15.3 R112.1
N$100: IO8.1 Q16.3 R114.1
N$101: IC2.18 R82.2
N$102: CV9.1 R92.1
N$103: C30.1 IC9.9 R91.1 R92.2 R93.2 R94.2
N$104: 5.1 IC6.5-IN2
N$107: C34.1 IC10.3
N$108: 28.1 IC6.28-RX7
N$109: 29.1 IC6.29-TX7
N$110: 30.1 IC6.30-CRX3
N$111: 31.1 IC6.31-CTX3
N$112: 32.1 IC6.32-OUT1B
N$113: 41.1 IC6.41-A17/MISO1
N$114: 40.1 IC6.40-A16/CS1
N$115: 39.1 IC6.39-A15/CS/OUT1A
N$116: 38.1 IC6.38-A14/CS/IN1
N$117: C33.1 IC11.3
N$118: 34.1 IC6.34-RX8
N$119: 35.1 IC6.35-TX8
N$120: 33.1 IC6.33-MCLK2
N$121: 36.1 IC6.36-PWM
N$122: 37.1 IC6.37-PWM
PE: C1.- C2.+ C3.- C6.1 C15.1 C18.1 C23.1 C24.2 C25.2 C26.1 C27.1 C32.1 C33.2 C34.2 C35.1 GND1.1 GND2.1 GND3.1 GND4.1 GND5.1 GND6.1 GND7.1 GND8.1 GND9.1 GND.1 IC1.3 IC1.5 IC1.10 IC1.12 IC2.10 IC2.15 IC2.16 IC2.17 IC3.3 IC3.5 IC3.10 IC3.11 IC3.12 IC4.3 IC4.5 IC4.10 IC4.11 IC4.12 IC5.3 IC5.5 IC5.10 IC5.12 IC6.GND1 IC6.GND3 IC6.GND6 IC7.2 IC8.1 IC9.3 IC9.5 IC9.10 IC9.11 IC9.12 IC10.5 IC10.6 IC10.13 IC10.14 IC10.15 IC10.16 IC11.5 IC11.6 IC11.13 IC11.14 IC11.15 IC11.16 IC12.1
SPI_CS_DAC1: 9_DAC_CS.1 IC6.9-OUT1C IC11.9
SPI_CS_DAC2: 8_DAC_CS.1 IC6.8-TX2/IN1 IC10.9
SPI_IO_CS: 10_IO_CS.1 IC2.11 IC6.10-CS\MQSR
SPI_MISO: 12_MISO.1 IC2.14 IC6.12-MISO/MQSL
SPI_MOSI: 11_MOSI.1 IC2.13 IC6.11-MOSI/CTX1 IC10.11 IC11.11
SPI_SCK: 13_SCK.1 IC2.12 IC6.13-SCK/LED IC10.10 IC11.10